# Altium PCB ali_tajik.PcbDoc
Units mm, origin at the board's own origin, x right, y up, seen from the top; angles counter-clockwise.
Board outline 100.08 x 70.99 mm, 2 copper layers (Top Layer, Bottom Layer); 28 components, 23 nets, 118 pads, 24 vias.
Unrouted connection lines stored in the file: 1.
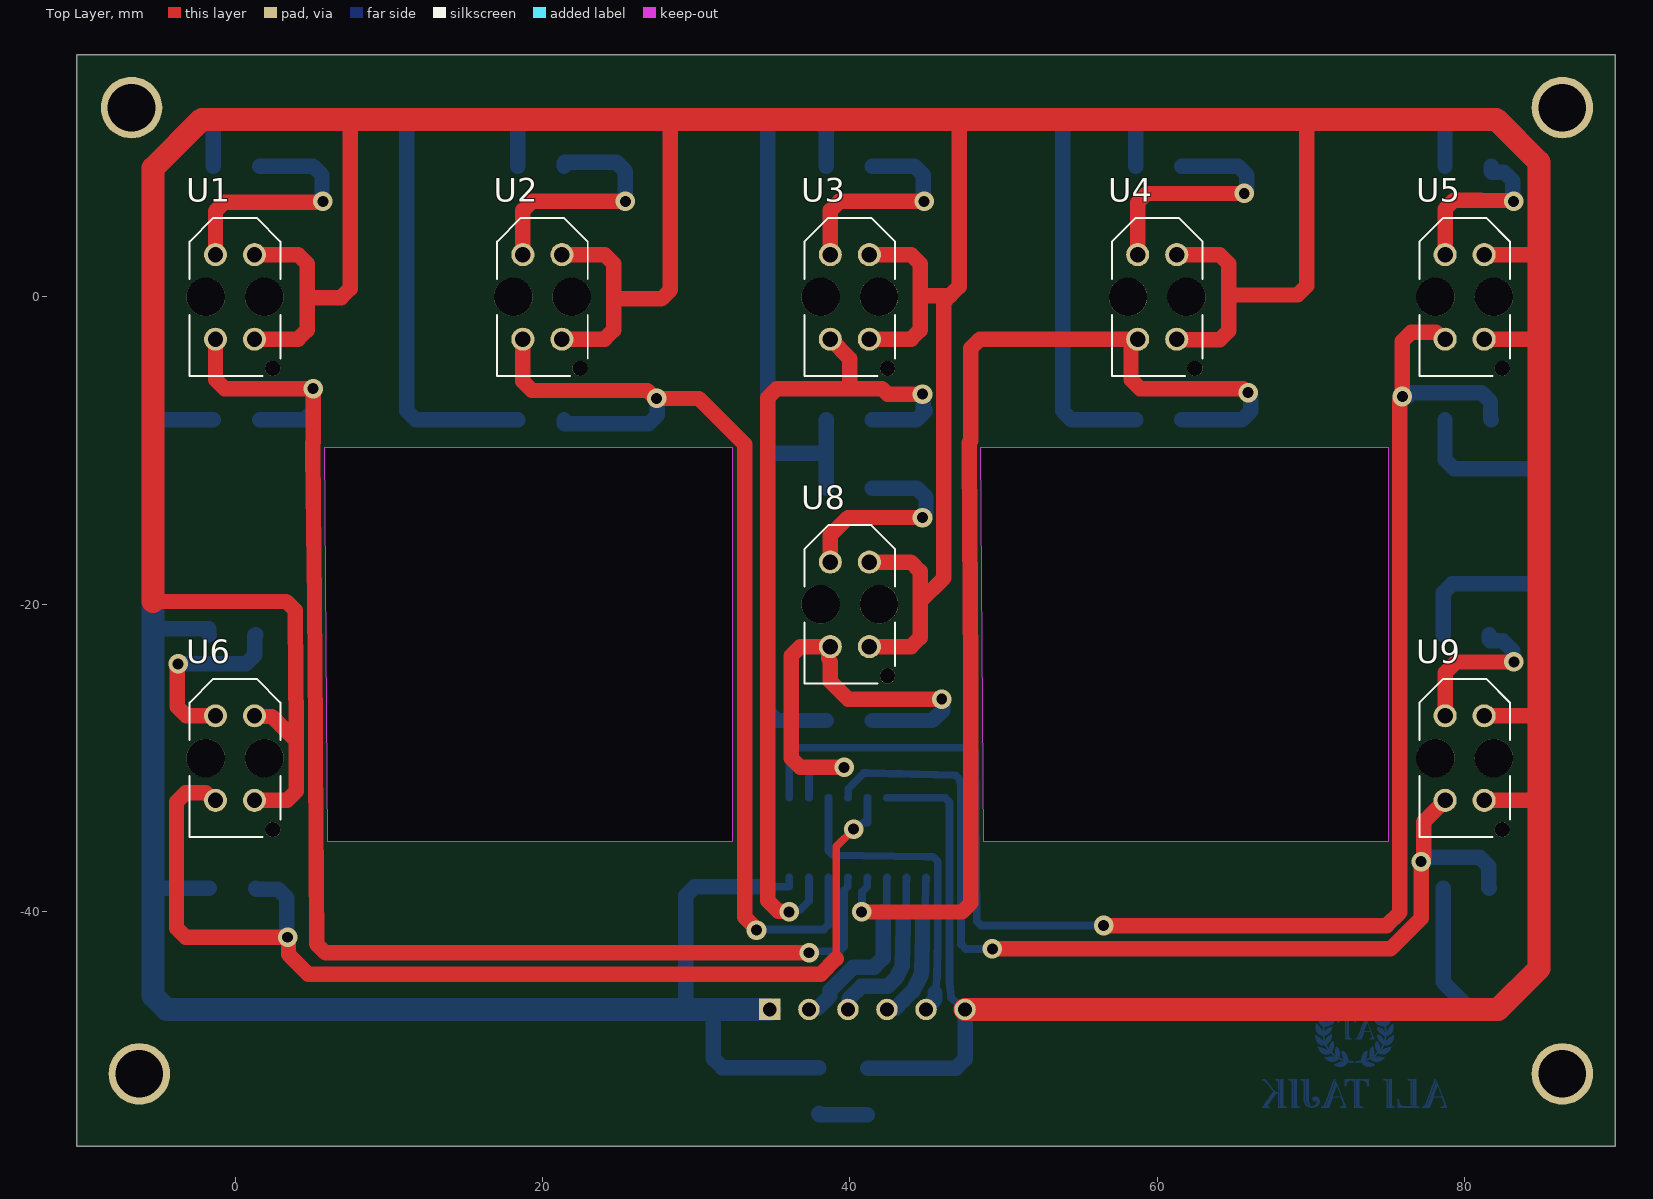
[diagram p0: Top Layer view]
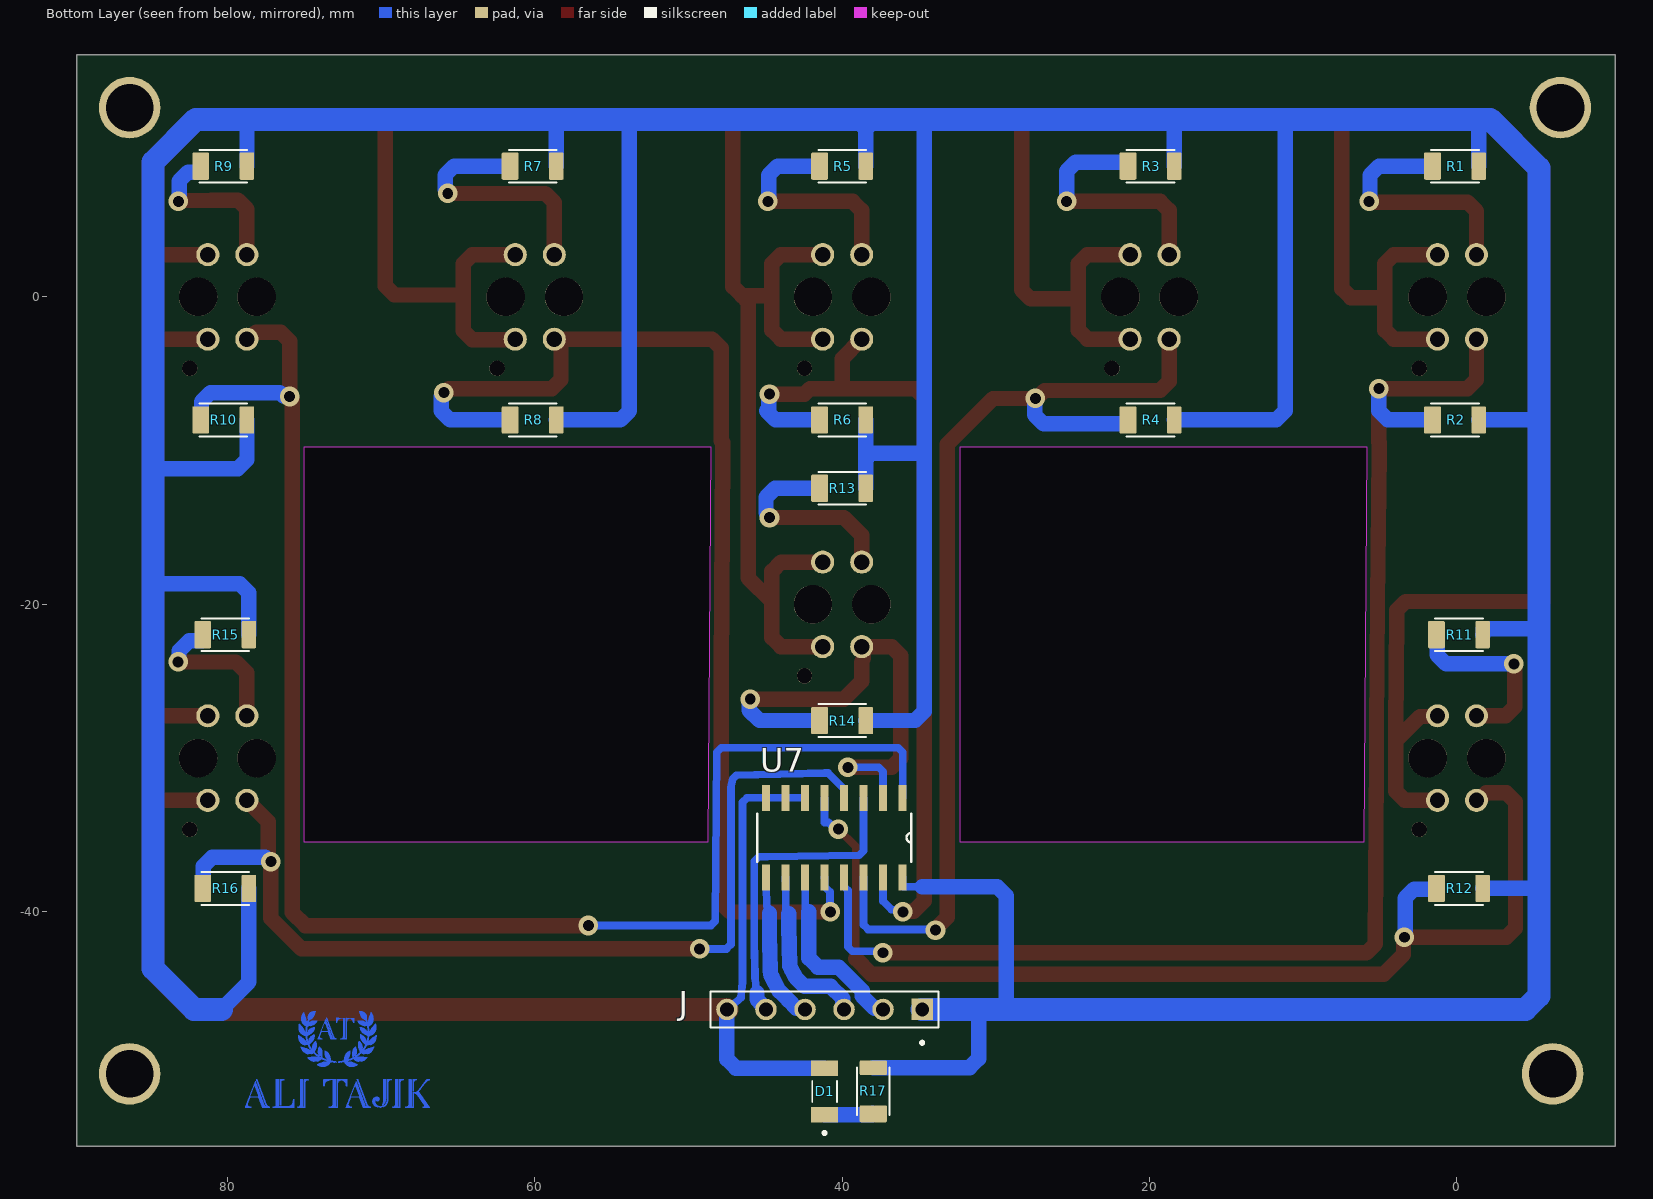
[diagram p1: Bottom Layer view, seen from below]
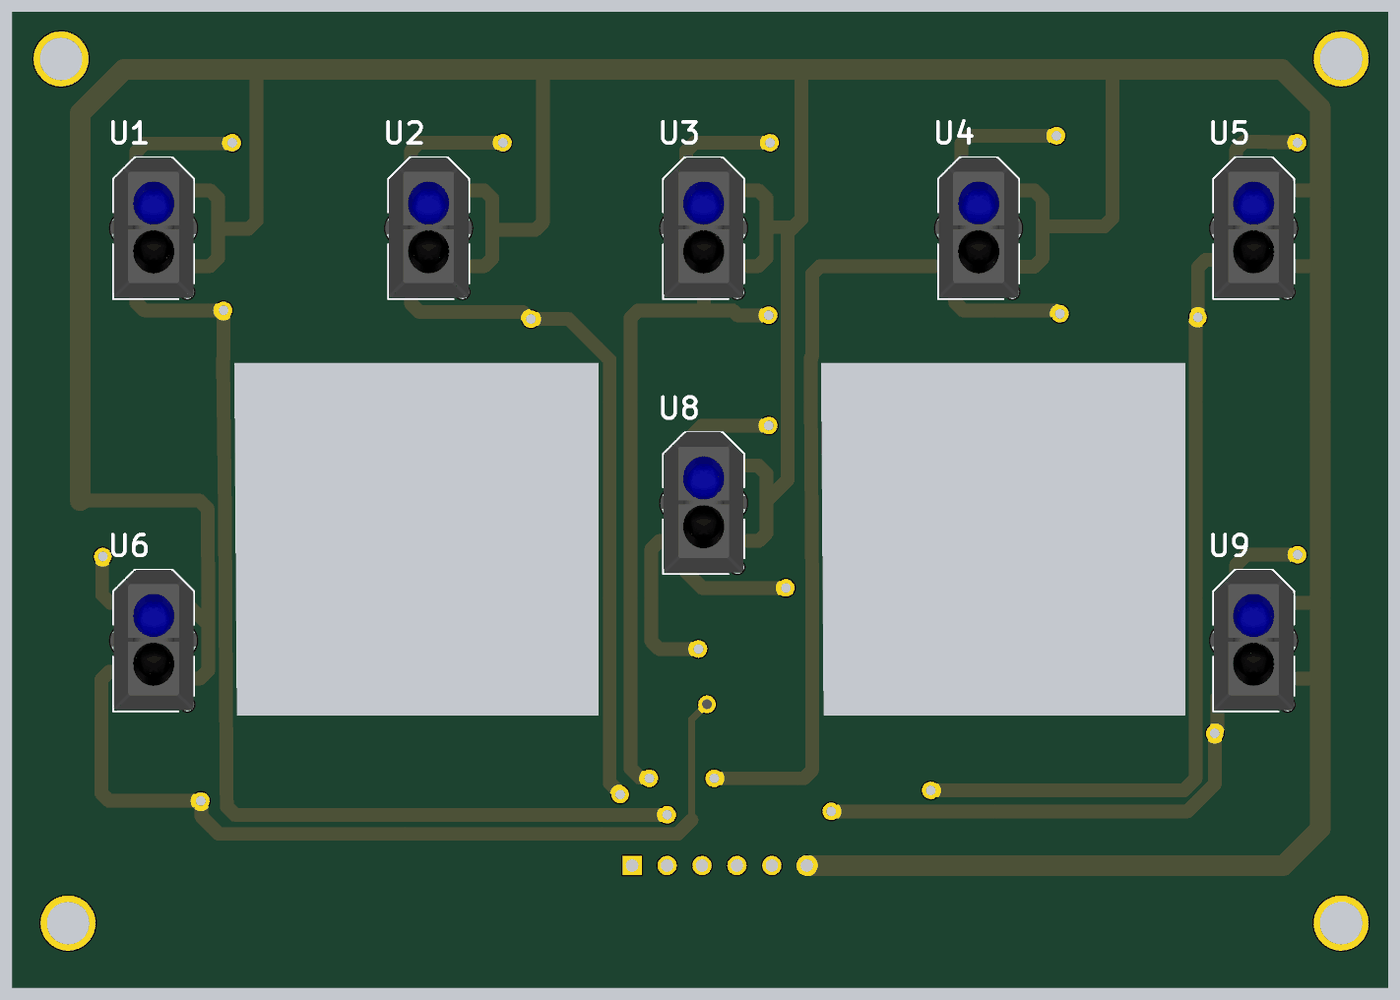
[diagram p2: 3D render of the assembled board from above, using the file's embedded part models]
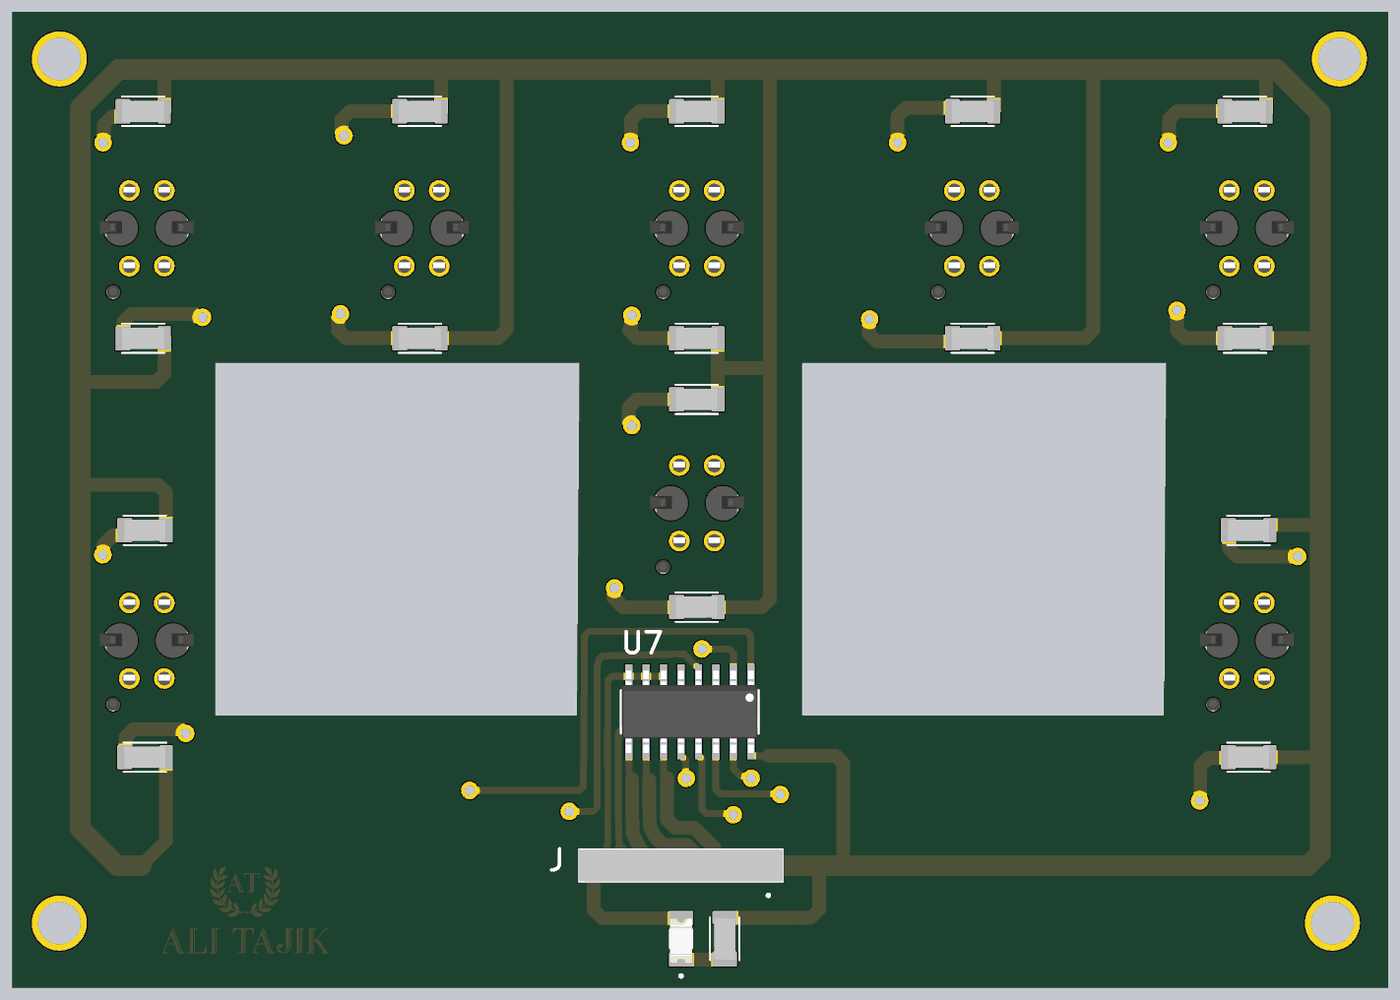
[diagram p3: 3D render of the assembled board from below, using the file's embedded part models]

## Layer stack, top to bottom
Top Solder: solder mask 0.0102, Solder Resist, Dk 3.5
Top Layer: signal copper 0.0356
Dielectric 1: dielectric 0.32, FR-4, Dk 4.8
Bottom Layer: signal copper 0.0356
Bottom Solder: solder mask 0.0102, Solder Resist, Dk 3.5

## Board outline
-10.287,-55.245 -10.287,15.748 89.789,15.748 89.789,-55.245
cut-out: 5.855,-9.779 32.353,-9.779 32.353,-35.433 6.042,-35.433
cut-out: 48.527,-9.779 75.025,-9.779 75.025,-35.433 48.714,-35.433

## Design rules (kind name [scope] priority, off if disabled: settings)
Clearance [All] p1: gap=0.254 ignorepadtopadclearanceinfootprint=FALSE except(0: Arc-Hole Track-Hole SMDPad-Hole THPad-Hole Via-Hole Fill-Hole Poly-Hole Region-Hole Text-Hole)
PolygonConnect [All] p1: connectstyle=Relief reliefconductorwidth=0.254 reliefentries=4 polygonreliefangle="90 Angle" airgapwidth=0.254
RoutingVias [All] p1: holewidth=0.711 width=1.27 viastyle="Through Hole" minholewidth=0.711 minwidth=1.27 maxholewidth=0.711 maxwidth=1.27
SolderMaskExpansion [All] p1: expansion=0.102 istentingtop=FALSE
Width [All] p1: maxlimit=1.5 minlimit=0.5 preferedwidth=1 minimp=50.000000 maximp=50.000000 favimp=50.000000
30 further rules are at their usual default settings.

## Components (designator, comment, footprint, x,y, rotation, side; value= is the part's Value field where it differs from the comment)
D1 "LHN974_RED_LED_1206" LEDC3216X120N 41.148,-51.689 r90 bottom
J "103321-6" TE_103321-6 41.148,-46.355 r0 bottom
R1 "2-1879462-9" RESC3115X65N 0.127,8.509 r180 bottom
R2 "2-1879462-9" RESC3115X65N 0.127,-8.001 r180 bottom
R3 "2-1879462-9" RESC3115X65N 19.939,8.509 r180 bottom
R4 "2-1879462-9" RESC3115X65N 19.939,-8.001 r180 bottom
R5 "2-1879462-9" RESC3115X65N 40.005,8.509 r180 bottom
R6 "2-1879462-9" RESC3115X65N 40.005,-8.001 r180 bottom
R7 "2-1879462-9" RESC3115X65N 60.139,8.509 r180 bottom
R8 "2-1879462-9" RESC3115X65N 60.139,-8.001 r180 bottom
R9 "2-1879462-9" RESC3115X65N 80.264,8.509 r180 bottom
R10 "2-1879462-9" RESC3115X65N 80.264,-8.001 r180 bottom
R11 "2-1879462-9" RESC3115X65N -0.127,-21.971 r180 bottom
R12 "2-1879462-9" RESC3115X65N -0.127,-38.481 r180 bottom
R13 "2-1879462-9" RESC3115X65N 40.005,-12.446 r180 bottom
R14 "2-1879462-9" RESC3115X65N 40.005,-27.559 r180 bottom
R15 "2-1879462-9" RESC3115X65N 80.137,-21.971 r180 bottom
R16 "2-1879462-9" RESC3115X65N 80.137,-38.481 r180 bottom
R17 "2-1879462-9" RESC3115X65N 37.973,-51.684 r90 bottom
U1 "TCRT5000" OPTO_TCRT5000 0,0 r90 top
U2 "TCRT5000" OPTO_TCRT5000 20,0 r90 top
U3 "TCRT5000" OPTO_TCRT5000 40,0 r90 top
U4 "TCRT5000" OPTO_TCRT5000 60,0 r90 top
U5 "TCRT5000" OPTO_TCRT5000 80,0 r90 top
U6 "TCRT5000" OPTO_TCRT5000 0,-30 r90 top
U7 "74HC4051D" SOIC127P600X175-16N 40.513,-35.179 r270 bottom
U8 "TCRT5000" OPTO_TCRT5000 40,-20 r90 top
U9 "TCRT5000" OPTO_TCRT5000 80,-30 r90 top

## Footprints (in the part's own frame and the unit in brackets; to place one, negate y for a bottom-side part, rotate by r counter-clockwise, add the part's x,y. Pads: shape width x height; smd on the part's side, far side on the other; paste and mask are expansions set on the pad)
LEDC3216X120N [mm]
  rect 1.01x1.73 smd: NEG(1.51,0) POS(-1.51,0)
  silkscreen extent -2.8,-0.8 0.69,0.8, body extent -1.73,-0.8 1.47,0.8, height 1.2
OPTO_TCRT5000 [mm]
  round 1.5 hole 1: A(2.75,1.27) CATH(2.75,-1.27) COLL(-2.75,1.27) E(-2.75,-1.27)
  round 1 hole 1 unplated: ""(-4.65,-2.45)
  round 2.5 hole 2.5 unplated: ""(0,1.9) ""(0,-1.9)
  silkscreen extent -5.15,-2.95 5.15,2.95, body extent -5.04,-3.4 5.16,3.4, height 7.2
RESC3115X65N [mm]
  rrect14% 1.09x1.77 smd: 1(-1.465,0)
  rrect14% 0.94x1.77 smd: 2(1.54,0)
  silkscreen extent -1.55,-1.07 1.55,1.07, body extent -1.55,-0.77 1.55,0.77, height 0.56
SOIC127P600X175-16N [mil]
  rect 67x21 smd: 1(-102,175) 2(-102,125) 3(-102,75) 4(-102,25) 5(-102,-25) 6(-102,-75) 7(-102,-125) 8(-102,-175) 9(102,-175) 10(102,-125) 11(102,-75) 12(102,-25) 13(102,25) 14(102,75) 15(102,125) 16(102,175)
  silkscreen extent -62,-197 62,197, body extent -118,-195 118,195, height 69
TE_103321-6 [mm]
  rect 1.398x1.398 hole 0.89: 1(-6.35,0)
  round 1.398 hole 0.89: 2(-3.81,0) 3(-1.27,0) 4(1.27,0) 5(3.81,0) 6(6.35,0)
  silkscreen extent -7.42,-1.17 7.42,2.27, body extent -7.42,-1.17 7.42,1.17, height 10.58

## Part data
D1: "2.6 V Red LED SMD", Package=None, Availability="Not in stock", Check_prices=https://www.snapeda.com/parts/LHN974%20RED%20LED%201206/Osram/view-part/7899607/?ref=eda, MF=Osram, MP="LHN974 RED LED 1206", Price=None, SnapEDA_Link=https://www.snapeda.com/parts/LHN974%20RED%20LED%201206/Osram/view-part/7899607/?ref=snap
J: "Pin 06 MODII HDR SRST B / A .100CL 6 POS", Package=None, Availability=Unavailable, MF="TE Connectivity", Mouser-Purchase-URL=https://snapeda.com/shop?store=Mouser&id=4238467, MP=103321-6, Price=None, SnapEDA_Link=https://www.snapeda.com/parts/103321-6/TE%20Connectivity/view-part/4238467/?ref=snap
R1 R2 R3 R4 R5 R6 R7 R8 R9 R10 R11 R12 R13 R14 R15 R16 R17: "RES 0.24 OHM 1% 1/4W 1206", Package=1206, Power_Rating=".25 W", Resistance=24, Tolerance=1%, Availability=Unavailable, EU_RoHS_Compliance="Compliant with Exemptions", MF="TE Connectivity", MP=2-1879462-9, Price=None, SnapEDA_Link=https://www.snapeda.com/parts/2-1879462-9/TE%20Connectivity/view-part/2213899/?ref=snap
U1 U2 U3 U4 U5 U6 U8 U9: "950 nm 60 mA Through Hole Reflective Optical Sensor with Transistor Output", Package=None, Availability=Unavailable, MP=TCRT5000, Price=None
U7: "1 Circuit IC Switch 8:1 130Ohm 16-SOIC", Package="SOIC-16 Toshiba", Availability="In Stock", Check_prices=https://www.snapeda.com/parts/74HC4051D/Toshiba/view-part/?ref=eda, MF=Toshiba, MP=74HC4051D, Price=None, Purchase-URL=https://pricing.snapeda.com/search/part/74HC4051D/?ref=eda, SnapEDA_Link=https://www.snapeda.com/parts/74HC4051D/Toshiba/view-part/?ref=snap

## Free pads (board coordinates)
  round 4 hole 3.1: 5(86.36,12.319) 6(86.36,-50.546) 7(-6.223,-50.546) 8(-6.731,12.319)

## Via types
v1: diameter 1.27, hole 0.711, Top Layer to Bottom Layer, 24 vias

## Nets (pads, with @x,y where several pads share a name; then routed paths per layer and width w, separated by ;. In a path a pad name is that pad's centre, name@x,y a point inside that pad or via, vN(x,y) a via of type N, cw(c..) or ccw(c..) an arc to the next point about the centre after c; other vN are vias at no path point)
+5: J.1 pad.8 R1.2 R2.2 R3.2 R4.2 R5.2 R6.2 R7.2 R8.2 R9.2 R10.2 R11.2 R12.2 R13.2 R14.2 R15.2 R16.2 R17.2 U7.16 | length 425.7
  Bottom Layer w0.5: 34.781,-38.371 36.051,-38.371 36.068,-38.354 U7.16
  Bottom Layer w1: -5.334,-38.354 -5.207,-38.481 R12.2 ; -5.334,-21.082 -4.83,-21.586 -1.697,-21.586 -1.697,-21.941 R11.2 ; -5.334,-7.747 -5.08,-8.001 R2.2 ; -1.524,11.557 -1.413,11.446 R1.2 ; 11.176,11.557 11.176,-7.415 11.762,-8.001 R4.2 ; R3.2 18.399,11.541 18.415,11.557 ; 24.638,-46.355 24.659,-46.334 ; 29.337,-46.355 29.337,-38.956 29.923,-38.371 34.781,-38.371 ; 31.115,-46.355 31.115,-49.558 31.701,-50.144 R17.2 ; 34.671,11.557 34.671,-26.973 35.257,-27.559 R14.2 ; 35.003,-10.16 38.084,-10.16 38.465,-10.541 ; R13.2 38.465,-10.541 ; R6.2 38.465,-10.541 ; R5.2 38.465,11.287 ; 53.975,11.557 53.848,11.43 53.848,-7.415 54.434,-8.001 R8.2 ; R7.2 58.599,11.546 58.61,11.557 ; 78.486,11.557 78.724,11.319 R9.2 ; R16.2 78.597,-44.561 80.391,-46.355 ; R15.2 78.597,-19.255 79.183,-18.669 84.709,-18.669 84.836,-18.542 ; R10.2 78.724,-10.59 79.31,-11.176 84.836,-11.176
  Bottom Layer w1.5: J.1 31.115,-46.355 29.337,-46.355 24.638,-46.355 -4.455,-46.355 -5.334,-45.476 -5.334,-38.354 -5.334,-21.082 -5.334,-7.747 -5.334,8.382 -2.159,11.557 -1.524,11.557 11.176,11.557 18.415,11.557 34.671,11.557 38.735,11.557 ; 38.465,11.287 38.735,11.557 ; 80.391,-46.355 82.169,-46.355 84.836,-43.688 84.836,-18.542 84.836,-11.176 84.836,8.763 82.042,11.557 78.486,11.557 58.61,11.557 53.975,11.557 38.735,11.557
GND: D1.NEG J.6 U1.CATH U1.E U2.CATH U2.E U3.CATH U3.E U4.CATH U4.E U5.CATH U5.E U6.CATH U6.E U7.6 U7.7 U7.8 U8.CATH U8.E U9.CATH U9.E | length 418.6
  Top Layer w1: -5.334,-19.812 2.927,-19.812 3.341,-19.812 3.634,-20.105 3.924,-20.395 3.927,-20.803 3.927,-20.807 3.98,-28.044 ; U6.E 1.405,-32.75 3.395,-32.75 3.98,-32.164 3.98,-28.144 ; U6.CATH 1.317,-27.297 2.405,-27.297 3.81,-28.702 3.88,-28.635 ; U1.E 4.113,-2.75 4.699,-2.164 4.699,-0.042 ; U1.CATH 4.113,2.75 4.699,2.164 4.699,-0.042 ; 7.493,11.557 7.493,0.544 6.907,-0.042 4.699,-0.042 ; U2.E 24.052,-2.75 24.638,-2.164 24.638,-0.127 ; U2.CATH 24.052,2.75 24.638,2.164 24.638,-0.127 ; 28.321,11.557 28.321,0.459 27.735,-0.127 24.638,-0.127 ; U8.E 43.991,-22.75 44.577,-22.164 44.577,-19.812 ; U8.CATH 43.969,-17.25 44.577,-17.858 44.577,-19.812 ; U3.E 43.991,-2.75 44.577,-2.164 44.577,2.164 43.991,2.75 U3.CATH ; 44.831,0.085 46.117,0.085 46.531,0.085 ; 46.99,11.557 47.117,11.43 47.117,0.671 46.531,0.085 ; U4.E 61.314,-2.794 64.057,-2.794 64.643,-2.208 64.643,0.127 ; U4.CATH 64.057,2.75 64.643,2.164 64.643,0.127 ; 69.723,11.557 69.723,0.713 69.137,0.127 64.643,0.127 ; U9.E 84.725,-32.75 84.836,-32.639 ; U9.CATH 84.637,-27.25 84.836,-27.051 ; U5.E 84.753,-2.75 84.836,-2.667 ; U5.CATH 84.792,2.75 84.836,2.794 ; 44.577,-19.812 46.117,-18.272 46.117,-0.329 46.531,0.085
  Top Layer w1.5: -5.334,-19.812 -5.334,8.382 -2.159,11.557 7.493,11.557 28.321,11.557 46.99,11.557 69.723,11.557 82.042,11.557 84.836,8.763 84.836,2.794 84.836,-2.667 84.836,-27.051 84.836,-32.639 84.836,-43.698 82.179,-46.355 J.6
  Bottom Layer w0.5: U7.6 U7.7 44.828,-32.588 46.189,-32.588 46.482,-32.881 46.482,-36.397 ; 46.482,-39.142 46.482,-44.577 46.485,-44.603 46.587,-45.589 46.731,-45.733 46.751,-45.749 J.6 ; 46.483,-39.142 46.483,-36.398
  Bottom Layer w1: D1.NEG 46.912,-50.179 47.498,-49.593 J.6
NetD1_POS: D1.POS R17.1 | length 3.3
  Bottom Layer w1: R17.1@38.018,-53.104 R17.1 38.018,-53.194 38.778,-53.194 38.783,-53.199 D1.POS
NetR1_1: R1.1 U1.A | length 16
  Top Layer w1: U1.A -1.27,5.586 -0.684,6.171 v1@5.663,6.171
  Bottom Layer w1: R1.1 5.078,8.509 5.663,7.923 5.663,6.275 v1(5.715,6.223)
NetR3_1: R3.1 U2.A | length 16.2
  Top Layer w1: U2.A 18.73,5.637 19.316,6.223 v1(25.4,6.223)
  Bottom Layer w1: R3.1 21.404,8.718 21.449,8.763 24.814,8.763 25.4,8.177 v1(25.4,6.223)
NetR5_1: R5.1 U3.A | length 14.4
  Top Layer w1: U3.A 38.73,5.637 39.316,6.223 v1@44.758,6.223
  Bottom Layer w1: R5.1 44.194,8.509 44.779,7.923 44.779,6.275 v1(44.831,6.223)
NetR7_1: R7.1 U4.A | length 16.3
  Top Layer w1: U4.A 58.73,6.145 59.316,6.731 v1(65.659,6.731)
  Bottom Layer w1: R7.1 65.246,8.509 65.832,7.923 65.832,6.977 65.659,6.804 v1(65.659,6.731)
NetR9_1: R9.1 U5.A | length 11
  Top Layer w1: U5.A 78.73,5.713 79.316,6.298 81.037,6.298 81.06,6.275 83.133,6.275 v1(83.185,6.223)
  Bottom Layer w1: R9.1 81.729,8.169 81.774,8.124 82.548,8.124 83.133,7.538 83.133,6.275 v1(83.185,6.223)
NetR11_1: R11.1 U6.A | length 12.1
  Top Layer w1: v1(-3.695,-23.876) -3.747,-23.928 -3.747,-26.664 -3.161,-27.25 U6.A
  Bottom Layer w1: v1(-3.695,-23.876) 0.707,-23.876 1.293,-23.29 1.293,-22.016 R11.1
NetR13_1: R13.1 U8.A | length 13.4
  Top Layer w1: U8.A 38.73,-15.499 39.878,-14.351 v1(44.728,-14.351)
  Bottom Layer w1: R13.1 44.372,-12.446 44.958,-13.032 44.958,-14.048 44.728,-14.278 v1(44.728,-14.351)
NetR15_1: R15.1 U9.A | length 10.5
  Top Layer w1: U9.A 78.73,-24.462 79.443,-23.749 v1(83.197,-23.749)
  Bottom Layer w1: R15.1 81.602,-22.311 81.647,-22.356 82.476,-22.356 83.145,-23.025 83.145,-23.697 v1(83.197,-23.749)
OUT: J.5 U7.3 | length 20.7
  Bottom Layer w0.5: U7.3 38.608,-35.822 38.608,-36.029 38.901,-36.322 44.874,-36.415 45.433,-36.415 45.729,-36.71 45.729,-38.829 ; 45.545,-45.275 45.582,-45.238 45.665,-44.306 45.667,-44.264 45.728,-41.881 45.728,-38.83
  Bottom Layer w1: J.5 45.545,-45.697 45.545,-45.275
S0: J.2 U7.11 | length 11.8
  Bottom Layer w0.5: 42.164,-40.005 42.401,-39.768 42.401,-37.787 U7.11
  Bottom Layer w1: J.2 37.414,-46.279 37.899,-46.279 38.7,-45.478 38.7,-45.124 40.226,-43.599 41.578,-43.599 42.164,-43.013 42.164,-40.005
S1: J.3 U7.10 | length 11.1
  Bottom Layer w0.5: 43.47,-40.117 43.486,-40.102 43.671,-39.917 43.671,-38.371 U7.10
  Bottom Layer w1: J.3 39.954,-46.279 39.954,-45.644 40.745,-44.853 42.114,-44.853 42.451,-44.853 43.037,-44.267 43.311,-43.739 43.418,-43.532 43.47,-40.946 43.47,-40.117
S2: J.4 U7.9 | length 9.7
  Bottom Layer w0.5: 44.724,-40.086 44.734,-40.063 44.759,-40.001 44.907,-39.598 44.941,-38.371 U7.9
  Bottom Layer w1: J.4 42.494,-46.279 42.979,-46.279 43.504,-45.754 44.09,-45.168 44.561,-44.257 44.661,-44.062 44.672,-43.838 44.724,-41.465 44.724,-40.086
Y0: R2.1 U1.COLL U7.13 | length 89.8
  Top Layer w1: U1.COLL -1.27,-5.383 -0.684,-5.969 v1(5.08,-5.969) 5.08,-9.433 5.047,-9.467 5.047,-10.091 5.049,-10.094 5.049,-10.157 5.174,-19.872 5.234,-28.136 5.234,-29.058 5.234,-29.887 5.316,-42.082 5.902,-42.668 6.313,-42.668 v1@37.273,-42.668
  Bottom Layer w0.5: v1(37.346,-42.668) 37.441,-42.573 39.331,-42.573 39.624,-42.28 39.624,-38.608 39.861,-38.371 39.861,-37.787 U7.13
  Bottom Layer w1: R2.1 4.494,-8.001 5.08,-7.415 v1(5.08,-5.969)
Y1: R4.1 U2.COLL U7.14 | length 66.3
  Top Layer w1: U2.COLL 18.73,-5.5 19.316,-6.085 26.84,-6.085 27.359,-6.604 30.191,-6.604 33.163,-9.576 33.163,-40.354 33.928,-41.119 v1(33.928,-41.192)
  Bottom Layer w0.5: v1(33.928,-41.192) 33.972,-41.148 38.315,-41.148 38.608,-40.855 U7.14
  Bottom Layer w1: R4.1 21.404,-8.21 21.449,-8.255 26.892,-8.255 27.478,-7.669 27.478,-6.65 v1(27.432,-6.604)
Y2: R6.1 U3.COLL U7.15 | length 56.5
  Top Layer w1: v1(36.051,-40.009) 35.999,-39.957 35.34,-39.957 34.671,-39.288 34.671,-6.555 35.257,-5.969 40.005,-5.969 42.093,-5.969 42.45,-6.326 v1(44.728,-6.326) ; U3.COLL 40.005,-4.025 40.005,-5.869
  Bottom Layer w0.5: v1(36.051,-40.009) 36.198,-39.862 36.788,-39.862 37.338,-39.311 U7.15
  Bottom Layer w1: R6.1 44.339,-8.001 44.925,-7.415 44.78,-7.27 44.78,-6.378 v1(44.728,-6.326)
Y3: R8.1 U4.COLL U7.12 | length 73.8
  Top Layer w1: v1(40.763,-40.012) 47.293,-40.012 47.586,-39.719 47.879,-39.427 47.879,-24.372 47.775,-10.094 47.773,-10.091 47.773,-9.467 47.879,-9.36 47.879,-3.336 48.172,-3.043 48.465,-2.75 U4.COLL 58.73,-2.885 58.293,-3.322 58.293,-5.383 58.879,-5.969 65.586,-5.969 65.84,-6.223 v1(65.913,-6.223)
  Bottom Layer w0.5: v1(40.763,-40.012) 40.795,-39.98 40.795,-38.707 41.131,-38.371 41.131,-37.787 U7.12
  Bottom Layer w1: R8.1 65.5,-8.001 66.086,-7.415 66.086,-6.469 65.913,-6.296 v1(65.913,-6.223)
Y4: R10.1 U5.COLL U7.1 | length 101.8
  Top Layer w1: v1(56.515,-40.894) 56.523,-40.902 74.922,-40.902 75.779,-40.045 75.779,-6.717 v1@75.946,-6.55 ; v1@75.946,-6.404 75.946,-2.872 76.532,-2.286 78.131,-2.286 78.595,-2.75 U5.COLL
  Bottom Layer w0.5: U7.1 36.068,-29.63 36.361,-29.337 40.257,-29.337 47.876,-29.337 48.022,-29.483 48.167,-29.628 48.247,-40.601 48.539,-40.893 v1@56.514,-40.893
  Bottom Layer w1: v1@76.019,-6.477 76.071,-6.425 76.379,-6.425 76.581,-6.223 81.098,-6.223 81.684,-6.809 81.684,-7.956 R10.1
  other v1: 75.946,-6.477
Y5: R12.1 U6.COLL U7.5 | length 72.9
  Top Layer w0.5: 39.116,-43.053 39.116,-35.754 v1(40.244,-34.626)
  Top Layer w1: U6.COLL -1.405,-32.75 -1.897,-32.258 -3.224,-32.258 -3.81,-32.844 -3.81,-41.07 -3.224,-41.656 v1(3.429,-41.656) 3.481,-41.708 3.481,-42.783 4.754,-44.057 38.112,-44.057 39.116,-43.053
  Bottom Layer w0.5: v1(40.244,-34.626) 40.452,-34.626 40.889,-34.189 41.148,-34.189 U7.5
  Bottom Layer w1: R12.1 1.338,-38.489 1.383,-38.534 2.792,-38.534 3.377,-39.12 3.377,-41.604 v1(3.429,-41.656)
Y6: R14.1 U7.2 U8.COLL | length 32.6
  Top Layer w1: 38.634,-23.496 38.634,-22.846 U8.COLL 36.781,-22.75 36.195,-23.336 36.195,-30.021 36.781,-30.607 v1(39.624,-30.607) ; 38.73,-23.76 38.73,-25.014 39.878,-26.162 v1(45.982,-26.162)
  Bottom Layer w0.5: U7.2 37.338,-30.9 37.631,-30.607 v1(39.624,-30.607)
  Bottom Layer w1: R14.1 45.38,-27.559 46.049,-26.89 46.034,-26.874 46.034,-26.214 v1(45.982,-26.162)
Y7: R16.1 U7.4 U9.COLL | length 64.7
  Top Layer w1: v1(49.276,-42.418) 75.179,-42.418 77.168,-40.429 77.168,-36.868 77.131,-36.831 77.08,-36.831 v1(77.168,-36.743) 77.168,-36.67 77.343,-36.495 77.343,-34.137 U9.COLL
  Bottom Layer w0.5: U7.4 39.895,-32.571 39.895,-31.987 40.906,-30.976 41.119,-30.976 46.872,-31.109 47.112,-31.348 47.222,-31.788 47.237,-31.909 47.237,-42.125 47.53,-42.418 v1(49.276,-42.418)
  Bottom Layer w1: v1(77.168,-36.743) 77.241,-36.743 77.535,-36.449 80.971,-36.449 81.557,-37.035 81.557,-38.436 R16.1
pads on no net: U1. U2. U3. U4. U5. U6. U8. U9.

## Other copper
Bottom Layer:
  drawing of 15 lines, arcs and shapes, not listed

## Silkscreen, mask and mechanical layers (free items; w line width, h text height)
Mechanical 1:
  the board outline again, w1

## Dimensions
89.789,15.748 to 89.789,-55.245 on Mechanical 1
-10.287,15.748 to 89.789,15.748 on Mechanical 1